# Altium PCB nanoDAP.factory.PcbDoc
Units mil, origin at the board's own origin, x right, y up, seen from the top; angles counter-clockwise.
Board outline 1929.13 x 748.09 mil, 2 copper layers (Top Layer, Bottom Layer); 27 components, 27 nets, 115 pads, 39 vias.
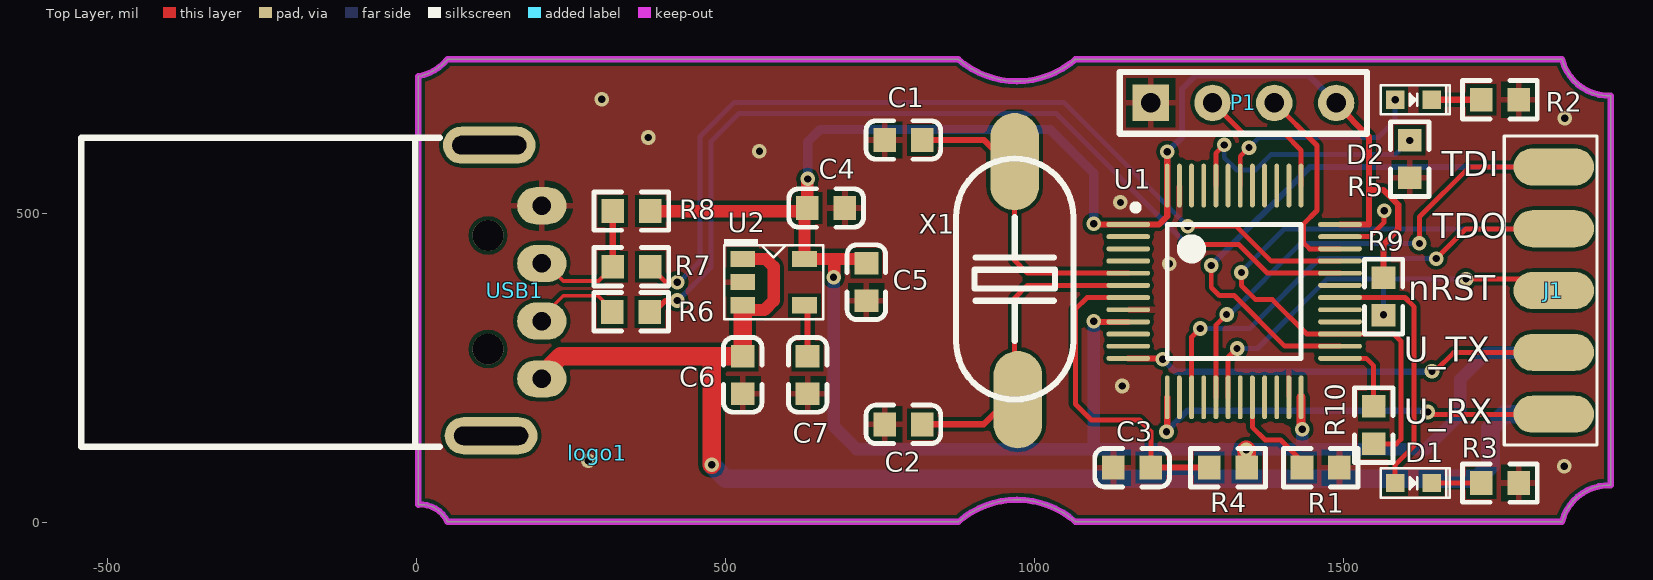
[diagram p0: Top Layer view]
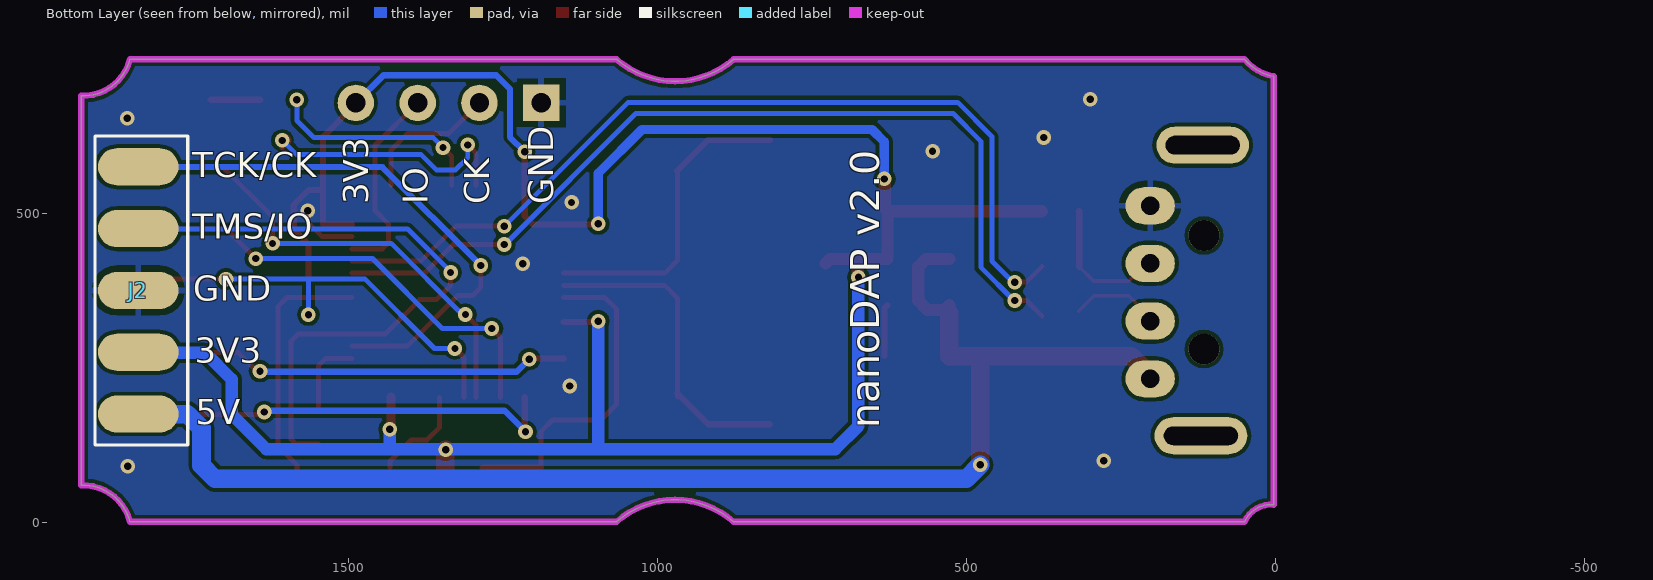
[diagram p1: Bottom Layer view, seen from below]
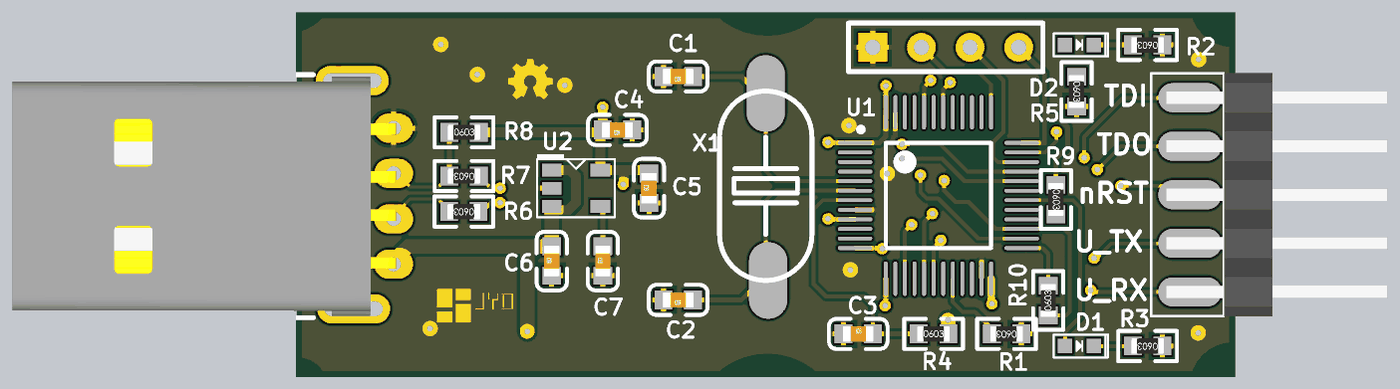
[diagram p2: 3D render of the assembled board from above, using the file's embedded part models]

## Layer stack, top to bottom
Top Solder: solder mask 0.4, Solder Resist, Dk 3.5
Top Layer: signal copper 1.4
Dielectric 1: dielectric 12.6, FR-4, Dk 4.8
Bottom Layer: signal copper 1.4
Bottom Solder: solder mask 0.4, Solder Resist, Dk 3.5

## Board outline
3.26,29.29 3.26,722.25 ccw(c-10.32,799.81) 50.5,749.8 50.46,749.79 877.26,749.79 877.27,749.8 ccw(c971.76,857.64) 1066.25,749.8 1066.26,749.79 1853.66,749.79 1853.66,749.81 ccw(c1929.91,769.45) 1932.39,690.75 1932.36,690.79 1932.36,60.79 1932.39,60.82 ccw(c1929.9,-17.88) 1853.65,1.77 1853.66,1.79 1066.26,1.79 1066.34,1.72 ccw(c971.85,-106.12) 877.36,1.72 877.26,1.79 50.46,1.79 50.5,1.77 ccw(c7.47,-17.72)

## Design rules (kind name [scope] priority, off if disabled: settings)
Clearance [All] p1: gap=6 ignorepadtopadclearanceinfootprint=FALSE
DiffPairsRouting [All] p1: maxlimit=10 minlimit=10 mostfreqgap=10 toplayer_minwidth=8 toplayer_maxwidth=15 toplayer_prefwidth=15 bottomlayer_minwidth=8 bottomlayer_maxwidth=15 bottomlayer_prefwidth=15 maxuncoupledlength=500
HoleSize [All] p1 off: absolutevalues=TRUE maxlimit=100 minlimit=1 maxpercent=80.000 minpercent=20.000
PolygonConnect [All] p1: thpad.connectstyle=Relief thpad.reliefconductorwidth=10 thpad.reliefentries=4 thpad.polygonreliefangle="90 Angle" thpad.airgapwidth=10 smdpad.connectstyle=Relief smdpad.reliefconductorwidth=10 smdpad.reliefentries=4 smdpad.polygonreliefangle="90 Angle" smdpad.airgapwidth=10 via.connectstyle=Direct via.reliefconductorwidth=10 via.reliefentries=4 via.polygonreliefangle="90 Angle" via.airgapwidth=10
RoutingVias [All] p1: holewidth=11.81 width=23.62 viastyle="Through Hole" minholewidth=11.81 minwidth=23.62 maxholewidth=11.81 maxwidth=23.62
SolderMaskExpansion [All] p1: expansion=4
Width [All] p1: maxlimit=100 minlimit=6 preferedwidth=10
28 further rules are at their usual default settings.

## Classes and differential pairs
differential pair USB: +USB_P -USB_N

## Components (designator, comment, footprint, x,y, rotation, side; value= is the part's Value field where it differs from the comment)
C1 "C0603" 0603_C 788.26,619.29 r180 top value=20pF
C2 "C0603" 0603_C 788.26,159.29 r180 top value=20pF
C3 "C0603" 0603_C 1158.26,89.29 r0 top value=0.1uF
C4 "1uf" 0603_C 663.26,509.29 r180 top value=1uF
C5 "104" 0603_C 728.26,389.29 r90 top value=0.1uF
C6 "1uf" 0603_C 528.26,239.29 r90 top value=1uF
C7 "223" 0603_C 633.26,239.29 r90 top
D1 "RED" 0603_LED 1613.26,64.29 r0 top
D2 "BLUE" 0603_LED 1613.26,684.29 r0 top
J1 "Header 5" HEADER_SMT_5 1840.27,175.75 r90 top
J2 "Header 5" HEADER_SMT_5 1840.27,575.94 r270 bottom
logo1 "logo" LOGO 293.26,113.29 r0 top
P1 "Header 4" HEADER_4x1 1188.26,679.29 r0 top
R1 "R0603" 0603_R 1463.26,89.29 r180 top value=10K
R2 "R0603" 0603_R 1753.26,684.29 r180 top value=10K
R3 "R0603" 0603_R 1753.26,64.29 r180 top value=10K
R4 "R0603" 0603_R 1313.26,89.29 r0 top value=10K
R5 "R0603" 0603_R 1607.26,588.29 r270 top value=10K
R6 "R0603" 0603_R 347.63,341.17 r180 top value=22R
R7 "R0603" 0603_R 348.26,414.29 r180 top value=22R
R8 "R0603" 0603_R 348.26,504.29 r0 top value=1K5
R9 "R0603" 0603_R 1565,366 r270 top value=10K
R10 "R0603" 0603_R 1549,158 r90 top value=100R
U1 "STM32F103C8T6" LQFP48_N 1323.26,374.29 r0 top locked
U2 "RT9193-33" SOT23-5 578.26,389.29 r90 top
USB1 "USB" USB_A_G 198.26,522.91 r270 top
X1 "XTAL" 49SMD 968.26,394.29 r270 top value=8MHz

## Footprints (in the part's own frame and the unit in brackets; to place one, negate y for a bottom-side part, rotate by r counter-clockwise, add the part's x,y. Pads: shape width x height; smd on the part's side, far side on the other; paste and mask are expansions set on the pad)
49SMD [mm]
  oval 4x2 smd: 1(-4.826,0) 2(4.953,0.127)
  silkscreen extent -4.95,-2.41 4.95,2.41
0603_C [mm]
  rect 0.93x0.98 smd: 1(-0.77,0) 2(0.77,0)
  silkscreen extent -1.53,-0.79 1.54,0.79, body extent -0.8,-0.4 0.8,0.4, height 0.3
0603_LED [mm]
  rect 0.75x0.75 smd: 1(-0.75,0) 2(0.75,0)
  silkscreen extent -1.35,-0.6 1.5,0.6
0603_R [mm]
  rect 0.93x0.98 smd: 1(-0.77,0) 2(0.77,0)
  silkscreen extent -1.53,-0.79 1.54,0.79, body extent -0.85,-0.4 0.85,0.4, height 0.56
HEADER_4x1 [mm]
  rect 1.5x1.5 hole 0.8: 1(0,0)
  round 1.5 hole 0.8: 2(2.54,0) 3(5.08,0) 4(7.62,0)
  silkscreen extent -1.27,-1.27 8.89,1.27
HEADER_SMT_5 [mil]
  oval 60x130 smd: 1(0,0) 2(100,0) 3(200,0) 4(300,0) 5(400,0)
  silkscreen extent -50,-70 450,80, body extent -50,-406 450,48, height 70
LOGO [mil]
LQFP48_N [mm]
  oval 1.8x0.2 smd: 1(-4.35,2.75) 2(-4.35,2.25) 3(-4.35,1.75) 4(-4.35,1.25) 5(-4.35,0.75) 6(-4.35,0.25) 7(-4.35,-0.25) 8(-4.35,-0.75) 9(-4.35,-1.25) 10(-4.35,-1.75) 11(-4.35,-2.25) 12(-4.35,-2.75) 25(4.35,-2.75) 26(4.35,-2.25) 27(4.35,-1.75) 28(4.35,-1.25) 29(4.35,-0.75) 30(4.35,-0.25) 31(4.35,0.25) 32(4.35,0.75) 33(4.35,1.25) 34(4.35,1.75) 35(4.35,2.25) 36(4.35,2.75)
  oval 0.2x1.8 smd: 13(-2.75,-4.35) 14(-2.25,-4.35) 15(-1.75,-4.35) 16(-1.25,-4.35) 17(-0.75,-4.35) 18(-0.25,-4.35) 19(0.25,-4.35) 20(0.75,-4.35) 21(1.25,-4.35) 22(1.75,-4.35) 23(2.25,-4.35) 24(2.75,-4.35) 37(2.75,4.35) 38(2.25,4.35) 39(1.75,4.35) 40(1.25,4.35) 41(0.75,4.35) 42(0.25,4.35) 43(-0.25,4.35) 44(-0.75,4.35) 45(-1.25,4.35) 46(-1.75,4.35) 47(-2.25,4.35) 48(-2.75,4.35)
  silkscreen extent -4.17,-2.75 2.75,3.57
SOT23-5 [mil]
  rect 26x40 smd: 1(37.4,50) 2(0,50) 3(-37.4,50) 4(-37.4,-50) 5(37.4,-50)
  silkscreen extent -60,-80 70,80
USB_A_G [mil]
  oval 60x80 hole 30: 1(10,5) 2(103.33,5) 3(196.67,5) 4(290,5)
  oval 60x150 hole 30 slot 120 at 90 deg: 5(-88,-80) 6(382.13,-77.13)
  round 50 hole 50: 7(58,-82) 8(242,-82)
  silkscreen extent -100,-740 400,-160, body extent -96,-778 396,10, height 178

## Part data
C1 C2 C3: "Capacitor", LatestRevisionDate=17-Jul-2002, LatestRevisionNote="Re-released for DXP Platform.", PackageDescription="Radial Cap, Thru-Hole; 2 Leads; 0.3 in Pin Spacing", PackageReference=RAD-0.3, Published=8-Jun-2000, Publisher="Altium Limited"
C4 C5 C6 C7: library part CAP, "Capacitor"
D1 D2: library part D0603, "Typical RED, GREEN, YELLOW, AMBER GaAs LED", LatestRevisionDate=17-Jul-2002, LatestRevisionNote="Re-released for DXP Platform.", PackageDescription="SM LED; 2 Flat Leads", PackageReference=3.2X1.6X1.1, PackageVersion=Feb-2002, Published=8-Jun-2000, Publisher="Altium Limited"
J1 J2: library part Header_5, "Header, 4-Pin", LatestRevisionDate=17-Jul-2002, LatestRevisionNote="Re-released for DXP Platform.", Publisher="Altium Limited"
P1: "Header, 4-Pin", LatestRevisionDate=17-Jul-2002, LatestRevisionNote="Re-released for DXP Platform.", Publisher="Altium Limited"
R1 R2 R3 R4 R5 R6 R7 R8 R9 R10: "Resistor", LatestRevisionDate=17-Jul-2002, LatestRevisionNote="Re-released for DXP Platform.", PackageDescription="Axial Device, Thru-Hole; 2 Leads; 0.3 in Pin Spacing", PackageReference=AXIAL-0.3, Published=8-Jun-2000, Publisher="Altium Limited"
U1: "LowPower MCU"
USB1: library part USB_G

## Via types
v1: diameter 23.62, hole 11.81, Top Layer to Bottom Layer, 39 vias

## Nets (pads, with @x,y where several pads share a name; then routed paths per layer and width w, separated by ;. In a path a pad name is that pad's centre, name@x,y a point inside that pad or via, vN(x,y) a via of type N, cw(c..) or ccw(c..) an arc to the next point about the centre after c; other vN are vias at no path point)
3V3: C4.2 C5.2 J2.4 P1.4 R4.2 R8.2 R9.1 U1.1 U1.9 U1.24 U1.36 U1.48 U2.5 | length 4119.6
  Top Layer w10: v1(1096.26,326.29) 1097.47,325.08 U1.9 ; v1@1097.47,482.56 U1.1 1201.53,482.56 1214.99,496.02 U1.48 1214.99,600.02 v1(1215.26,600.29) ; v1@1431.53,153.02 v1(1433.26,151.29) ; P1.4 1488.26,677.98 1541.35,624.9 1541.35,538 ; U1.36 1541.35,482.56 1541.35,538 ; R9.1@1565,397.31 1565,451 1588.81,474.81 1588.81,514.45 1565,538.26 1541.61,538.26 1541.35,538
  Top Layer w15: v1@1431.53,153.02 U1.24
  Top Layer w20: R8.2 627.94,504.29 C4.2@628.26,504.61 ; v1(633.26,556.29) 632.94,555.98 C4.2 C4.2@628.26,504.61 ; v1(675.26,397.29) 676.26,398.29 676.26,426.69 ; C5.2 721.17,426.69 676.26,426.69 ; C4.2@628.26,504.61 U2.5 676.26,426.69
  Top Layer w30: v1(1343,118) 1343.57,117.43 R4.2
  Bottom Layer w10: v1(1215.26,600.29) 1239,624.03 1239,702 1261,724 1443.55,724 P1.4
  Bottom Layer w15: v1(633.26,556.29) 633.26,616.29 653.26,636.29 1025.26,636.29 1096.26,565.29 v1(1096.26,483.77)
  Bottom Layer w20: v1(675.26,397.29) 675.26,156.74 713,119 1096.26,119 ; v1(1096.26,326.29) 1096.26,119 ; 1379.26,118.74 1379,119 ; v1(1433.26,151.29) 1433.26,119.74 1434,119 ; J2.4@1840.27,275.35 1732.35,275.35 1689,232 1689,175 1633,119 1434,119 ; 1096.26,119 1379,119 ; 1379,119 1434,119
5V_USB: C6.2 J2.5 U2.1 U2.3 USB1.4 | length 2202.8
  Top Layer w20: U2.3 535.86,344.29 563.26,344.29 578.26,359.29 578.26,414.29 565.86,426.69 U2.1
  Top Layer w30: USB1.4@203.26,239.29 233.57,269.61 478,269.61 ; v1(478,94) 478,269.61 ; U2.3@528.26,339.29 C6.2 478,269.61
  Bottom Layer w30: v1(478,94) 501,71 1716,71 1738,93 1738,153 1760.94,175.94 J2.5
BOOT0: R5.1 U1.44 | length 431.5
  Top Layer w8: U1.44 1293.73,597.76 v1(1307.26,611.29) ; R5.1@1602.94,611.29 R5.1@1607.94,606.29
  Top Layer w20: R5.1@1602.57,618.61 v1(1607.26,618.61)
  Bottom Layer w8: v1(1307.26,611.29) 1307.26,590.74 1327,571 1358,571 1383,596 1584.65,596 v1(1607.26,618.61)
BOOT1: R1.2 U1.20 | length 161.6
  Top Layer w8: U1.20 1352.79,154.76 1373.26,134.29 1398.26,134.29 1432.94,99.61 R1.2
D_SWCLK: P1.2 U1.37 | length 232.1
  Top Layer w8: P1.2 1337.55,630 1404.09,630 1431.53,602.56 U1.37
D_SWDIO: P1.3 U1.34 | length 327.1
  Top Layer w8: P1.3 1457.26,610.29 1457.26,505.26 1435.26,483.26 1435.26,453.29 1445.36,443.19 U1.34
GND: C1.2 C2.2 C3.1 C4.1 C5.1 C6.1 C7.1 J2.3 P1.1 R1.1 R2.1 R3.1 R5.2 U1.8 U1.23 U1.35 U1.47 U2.2 USB1.1 | length 100.1
  Top Layer w8: U1.35 1542.87,462.87 1566,486 v1(1566,505)
  other v1: 1857.26,91.29 278.26,100.29 1142.26,221.29 1218.26,419.29 1139.26,518.29 555.26,601.29 375.26,623.29 1858.26,654.29 300.26,685.29
LED_CON: D2.1 U1.42 | length 358.1
  Top Layer w8: U1.42 1333.1,592.77 v1(1347.33,607) v1@1350,607
  Bottom Layer w8: v1(1347.33,607) 1363.33,623 1556,623 1583.73,650.73 v1(1583.73,684.29)
LED_RUN: D1.1 U1.30 | length 424.1
  Top Layer w8: U1.30 1599.55,364.45 1614.45,349.55 1614.45,124.45 1583.73,93.73 D1.1
NetC1_1: C1.1 U1.5 X1.1 | length 507.6
  Top Layer w8: X1.1@968.26,569.29 968.26,424.29 988.73,403.82 U1.5
  Top Layer w10: C1.1 918.26,619.29 X1.1@968.26,569.29
NetC2_1: C2.1 U1.6 X1.2 | length 522.6
  Top Layer w8: X1.2@968.26,203.66 968.26,363.66 988.73,384.13 U1.6
  Top Layer w10: C2.1 918.26,159.29 X1.2@968.26,209.29
NetC3_2: C3.2 R4.1 U1.7 | length 540.4
  Top Layer w8: U1.7 1085.42,364.45 1066.26,345.29 1066.26,192.29 1092.26,166.29 1170.26,166.29 1188.57,147.98 C3.2
  Top Layer w10: C3.2 R4.1
NetC7_2: C7.2 U2.4 | length 84.4
  Top Layer w10: U2.4 633.26,346.89 C7.2
NetD1_2: D1.2 R3.2 | length 80.2
  Top Layer w8: D1.2 R3.2
NetD2_2: D2.2 R2.2 | length 80.2
  Top Layer w10: D2.2 R2.2
NetR6_2: R6.2 USB1.3 | length 140.1
  Top Layer w6: USB1.3@203.26,332.63 237.93,367.29 294.26,367.29 R6.2@318.85,342.7
NetR7_2: R7.2 R8.1 USB1.2 | length 228.6
  Top Layer w6: USB1.2@203.26,425.96 237.93,391.29 294.94,391.29 R7.2
  Top Layer w10: R7.2 R8.1
NetR10_2: R10.2 U1.25 | length 125.1
  Top Layer w8: U1.25 1536.98,266.02 1549,254 R10.2
nRST: J1.3 R9.2 U1.18 | length 709.2
  Top Layer w8: U1.18 1313.42,267.42 v1(1328,282) ; v1(1698.26,394.29) 1821.33,394.29 J1.3@1840.27,375.35
  Bottom Layer w8: v1(1328,282) 1360.97,282 1473.26,394.29 1565,394.29 ; v1(1565,336.68) 1565,394.29 ; v1(1698.26,394.29) 1565,394.29
TCK_SWCLK: J2.1 U1.26 | length 903.1
  Top Layer w8: v1(1286.26,416.29) 1286.26,380.74 1299.19,367.81 1323.19,367.81 1405.29,285.71 U1.26
  Bottom Layer w10: v1(1286.26,416.29) 1445.32,575.35 J2.1@1840.27,575.35
TDI: J1.5 U1.17 | length 794.3
  Top Layer w8: U1.17 1293.73,319.73 v1(1311,337) ; v1(1623,452) 1623,495 1703.35,575.35 J1.5@1840.27,575.35
  Bottom Layer w8: v1(1311,337) 1315.97,337 1430.97,452 v1(1623,452)
TDO: J1.4 U1.15 | length 755.7
  Top Layer w8: U1.15 1254.36,300.39 v1(1268.26,314.29) ; v1(1650.07,427.48) 1697.94,475.35 J1.4@1840.27,475.35
  Bottom Layer w8: v1(1268.26,314.29) 1348.26,314.29 1461.45,427.48 v1(1650.07,427.48)
TMS_SWDIO: J2.2 R10.1 U1.27 | length 1057.3
  Top Layer w8: v1(1335,405) 1335,384 1358,361 1385,361 1440.61,305.39 U1.27 1581.61,305.39 1593,294 1593,135 1585.69,127.69 R10.1
  Bottom Layer w8: v1(1335,405) 1335,406 1404.35,475.35 J2.2@1840.27,475.35
UART2_RX: J1.1 U1.13 | length 697.6
  Top Layer w8: v1(1636.26,179.29) 1640.2,175.35 J1.1@1840.27,175.35
  Top Layer w10: v1@1214.99,148.5 U1.13
  Bottom Layer w10: v1(1213.78,147.29) 1247.78,181.29 1634.26,181.29 v1(1636.26,179.29)
UART2_TX: J1.2 U1.12 | length 708.4
  Top Layer w8: v1(1643.26,245.29) 1648.26,245.29 1678.32,275.35 J1.2@1840.27,275.35
  Top Layer w10: U1.12 v1@1206.53,266.02
  Bottom Layer w10: v1(1207.74,264.81) 1228.26,244.29 1642.26,244.29 v1(1643.26,245.29)
USB_N: R6.1 U1.32 | length 1479
  Top Layer w8: R6.1@377.94,334.17 403.44,359.67 v1(422.26,359.67) ; v1(1248.26,450.29) 1330.8,450.29 1377.28,403.82 U1.32
  Bottom Layer w8: v1(422.26,359.67) 423.48,359.67 477.26,413.45 477.26,617.29 522.26,662.29 1035.04,662.29 1247.04,450.29 v1(1248.26,450.29)
USB_P: R7.1 U1.33 | length 1471.4
  Top Layer w8: R7.1 403.57,389.29 v1(422.26,389.29) ; v1(1248.26,479.91) 1326.64,479.91 1383.26,423.29 1417.26,423.29 1417.47,423.5 U1.33
  Bottom Layer w8: v1(422.26,389.29) 425.26,389.29 459.26,423.29 459.26,624.75 514.8,680.29 1047.88,680.29 v1(1248.26,479.91)
pads on no net: U1.2 U1.3 U1.4 U1.10 U1.11 U1.14 U1.16 U1.19 U1.21 U1.22 U1.28 U1.29 U1.31 U1.38 U1.39 U1.40 U1.41 U1.43 U1.45 U1.46 USB1.5 USB1.6 USB1.7 USB1.8

## Polygon pours and split planes (outlines as drawn)
GND on Top Layer "GND_L01_P000" (solid, remove dead copper, pour order 0): 3.26,-0.71 3.26,754.29 1933.26,754.29 1933.26,-0.71
GND on Bottom Layer "GND_L02_P002" (solid, remove dead copper, pour order 2): 3.26,-0.71 3.26,754.29 1933.26,754.29 1933.26,-0.71

## Keep-outs
Keep-Out Layer:
  lines w10: 3.26,29.33 cw(c7.47,-17.72) 50.5,1.77 ; 50.46,1.79 877.26,1.79 ; 50.46,749.79 877.26,749.79 ; 50.46,749.82 877.26,749.82 ccw(c971.76,857.64) 1066.25,749.8 1853.66,749.82 ccw(c1929.91,769.45) 1932.39,690.75 1932.42,60.79 ; 50.5,749.8 cw(c-10.32,799.81) 3.26,722.25 ; 877.36,1.72 cw(c971.85,-106.12) 1066.34,1.72 ; 1066.26,1.79 1853.66,1.79 cw(c1929.9,-17.88) 1932.39,60.82 ; 1066.26,749.79 1853.66,749.79 ; 1932.36,60.79 1932.36,690.79 ; 3.26,722.29 3.26,29.29 3.26,722.29

## Silkscreen, mask and mechanical layers (free items; w line width, h text height)
Top Overlay:
  text "TDI" at 1658.88,560.29 h40
  text "TDO" at 1644.22,460.29 h40
  text "nRST" at 1605.23,360.29 h40
  text "U_TX" at 1597.26,260.29 h40
  text "U_RX" at 1597.26,160.29 h40
Bottom Overlay:
  text "TCK/CK" at 1753.26,559.29 h40
  text "GND" at 1169.26,515.29 h40 r270
  text "CK" at 1272.26,515.29 h40 r270
  text "IO" at 1372.26,515.29 h40 r270
  text "3V3" at 1468.26,515.29 h40 r270
  text "TMS/IO" at 1753.26,459.29 h40
  text "GND" at 1751.26,359.29 h40
  text "3V3" at 1749.26,259.29 h40
  text "5V" at 1747.26,159.29 h40
  text "nanoDAP v2.0" at 626.02,153.35 h80 r270
Top Solder:
  region: 490.25,654.86 490.39,654.52 490.37,654.52 492.48,643.54 492.62,643.2 492.84,643.11 502.03,639.3 502.26,639.21 502.6,639.35 502.59,639.36 511.84,645.63 512.18,645.77 512.63,645.59 512.59,645.55 520.54,637.68 520.72,637.23 520.58,636.89 520.57,636.9 514.3,627.65 514.16,627.31 514.26,627.08 518.06,617.89 518.16,617.67 518.49,617.53 518.5,617.54 529.47,615.43 529.81,615.29 529.99,614.84 529.95,614.84 529.99,603.66 529.81,603.21 529.47,603.07 529.47,603.08 518.49,600.98 518.16,600.84 518.06,600.61 514.26,591.42 514.16,591.19 514.3,590.86 514.31,590.86 520.58,581.61 520.72,581.28 520.54,580.82 520.5,580.86 512.63,572.92 512.18,572.73 511.84,572.87 511.85,572.88 502.6,579.15 502.26,579.29 502.03,579.2 497.83,577.45 497.6,577.36 497.15,577.55 497.05,577.78 489.31,596.75 489.21,596.98 489.4,597.43 489.6,597.51 489.67,597.36 493.52,599.93 496.38,604.21 497.38,609.25 496.38,614.29 493.52,618.57 489.24,621.42 484.2,622.43 479.16,621.42 474.88,618.57 472.03,614.29 471.03,609.25 472.03,604.21 474.88,599.93 478.73,597.36 478.8,597.51 479,597.43 479.19,596.98 479.1,596.75 471.35,577.78 471.26,577.55 470.8,577.36 470.58,577.45 466.37,579.2 466.14,579.29 465.81,579.15 465.81,579.14 456.56,572.87 456.23,572.73 455.78,572.92 455.81,572.95 447.87,580.82 447.68,581.28 447.82,581.61 447.83,581.61 454.1,590.86 454.24,591.19 454.15,591.42 450.34,600.61 450.25,600.84 449.91,600.98 449.91,600.96 438.93,603.07 438.6,603.21 438.41,603.66 438.46,603.66 438.41,614.84 438.6,615.29 438.93,615.43 438.94,615.42 449.91,617.53 450.25,617.67 450.34,617.89 454.15,627.08 454.24,627.31 454.1,627.65 454.09,627.64 447.82,636.89 447.68,637.23 447.87,637.68 447.9,637.64 455.78,645.59 456.23,645.77 456.56,645.63 456.56,645.62 465.81,639.35 466.14,639.21 466.37,639.3 475.56,643.11 475.79,643.2 475.93,643.54 475.91,643.55 478.02,654.52 478.16,654.86 478.61,655.04 478.61,655 489.79,655.04
Bottom Solder:
  drawing of 10 lines, arcs and shapes, not listed